# EAGLE board Gen7Extention (EAGLE 6.5.0)
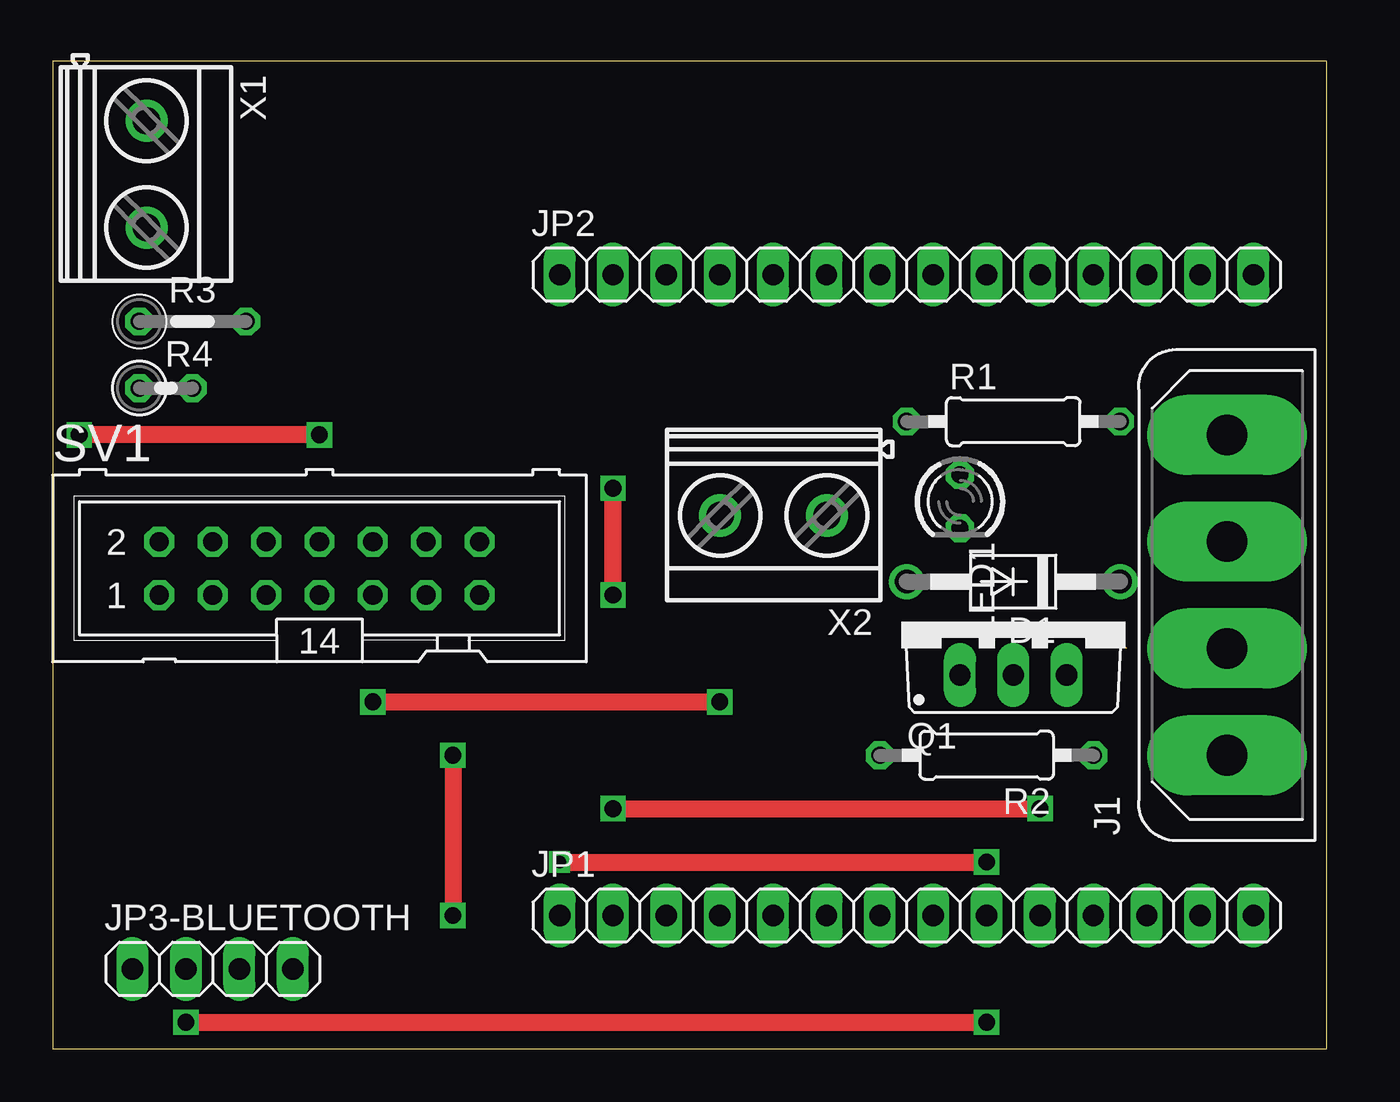
[diagram p0: board, top side]
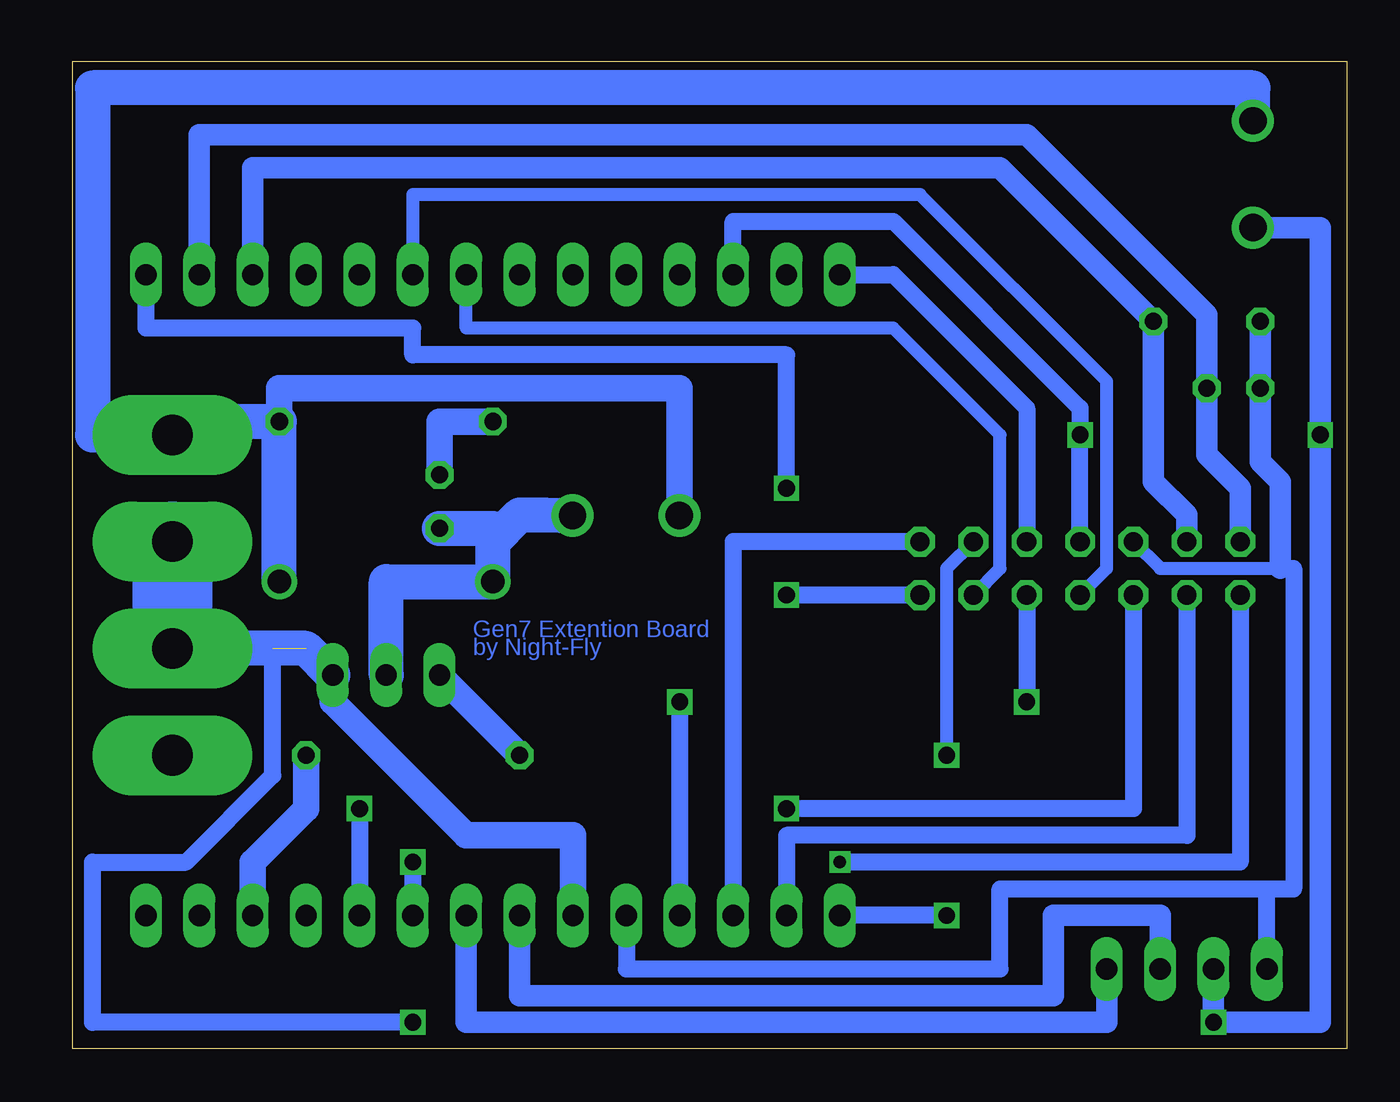
[diagram p1: board, bottom side, seen from below]

Size 60.63 x 46.98 mm. Coordinates in mm from the lower left corner, seen from the top.
Outline: 0,0 60.63,0 60.63,46.98 0,46.98 0,0
Copper layers (1*16): Top 0.035mm / dielectric 1.5mm / Bottom 0.035mm
Design rules "default": minimum track width 10mil, minimum drill 24mil, track to track 8mil, track to pad 8mil, pad to pad 8mil, via to via 8mil, smd to smd 8mil, copper to edge 40mil, drill to drill 8mil, minimum pad ring 10mil, minimum via ring 8mil, stop-mask expansion 4mil, vias tented up to drill 0mil, thermal gap 10mil
Net classes: 0 default: clearance 0.205 mm

## Footprints (pad centres in the part's own frame; a part is rotated, then mirrored left to right if it is on the bottom)
DO41-10 = drill 1.118: A 5.08,0; C -5.08,0
FLOPPY-4 = drill 1.93 pad 3.81 long: 1 7.62,0; 2 2.54,0; 3 -2.54,0; 4 -7.62,0
1X14 = drill 1.016 long: 1 -16.51,0; 2 -13.97,0; 3 -11.43,0; 4 -8.89,0; 5 -6.35,0; 6 -3.81,0; 7 -1.27,0; 8 1.27,0; 9 3.81,0; 10 6.35,0; 11 8.89,0; 12 11.43,0; 13 13.97,0; 14 16.51,0
1X04 = drill 1.016 long: 1 -3.81,0; 2 -1.27,0; 3 1.27,0; 4 3.81,0
LED3MM = drill 0.813 octagon: A -1.27,0; K 1.27,0
TO220BV = drill 1.016 long: D 0,-2.54; G -2.54,-2.54; S 2.54,-2.54
0207/10 = drill 0.813 octagon: 1 -5.08,0; 2 5.08,0
0207/5V = drill 0.813 octagon: 1 -2.54,0; 2 2.54,0
0207/2V = drill 0.813 octagon: 1 -1.27,0; 2 1.27,0
ML14 = drill 0.914 octagon: 1 -7.62,-1.27; 2 -7.62,1.27; 3 -5.08,-1.27; 4 -5.08,1.27; 5 -2.54,-1.27; 6 -2.54,1.27; 7 0,-1.27; 8 0,1.27; 9 2.54,-1.27; 10 2.54,1.27; 11 5.08,-1.27; 12 5.08,1.27; 13 7.62,-1.27; 14 7.62,1.27
MKDSN1,5/2-5,08 = drill 1.3 pad 2: 1 -2.561,0.025; 2 2.519,0.025

## Placement (x,y rotation side)
D1  1N4004  [DO41-10]  45.72,22.22 180 top
J1  [FLOPPY-4]  55.88,21.59 90 top
JP1  [1X14]  40.64,6.35 0 top
JP2  [1X14]  40.64,36.83 0 top
JP3-BLUETOOTH  [1X04]  7.62,3.81 0 top
LED1  [LED3MM]  43.18,26.04 270 top
Q1  IRLB 8743  [TO220BV]  45.72,20.32 0 top
R1  560  [0207/10]  45.72,29.84 0 top
R2  10  [0207/10]  44.45,13.97 180 top
R3  [0207/5V]  6.67,34.61 0 top
R4  [0207/2V]  5.4,31.43 0 top
SV1  [ML14]  12.7,22.86 0 top
X1  MKDSN1,5/2-5,08  [MKDSN1,5/2-5,08]  4.45,41.59 270 top
X2  MKDSN1,5/2-5,08  [MKDSN1,5/2-5,08]  34.29,25.4 180 top

## Library data of the parts
D1 = diode
J1 = con-amp
JP1 JP2 JP3-BLUETOOTH = pinhead
LED1 = led
Q1 = transistor-power
R1-R4 = rcl
SV1 = con-harting-ml; OC_FARNELL: unknown; OC_NEWARK: unknown
X1 X2 = con-phoenix-508; MPN: MKDSN 1,5/2-5.08; OC_FARNELL: 1792903; OC_NEWARK: 30M2397

## Nets
+12V: D1.C J1.1 R1.2 X1.1 X2.2
GND: J1.2 J1.3 JP1.6 JP2.3 JP3-BLUETOOTH.2 Q1.S SV1.8 X1.2
N$1: JP1.1 SV1.12
N$2: JP1.2 SV1.3
N$3: JP1.3 SV1.14
N$4: JP1.4 SV1.9
N$5: JP1.5 JP3-BLUETOOTH.1 R3.1 R4.1 SV1.6
N$6: JP1.7 JP3-BLUETOOTH.3
N$7: JP1.8 JP3-BLUETOOTH.4
N$8: D1.A LED1.K Q1.D X2.1
N$9: LED1.A R1.1
N$10: JP1.12 R2.1
N$11: Q1.G R2.2
N$12: JP2.13 R4.2 SV1.2
N$13: JP2.12 R3.2 SV1.4
N$14: JP2.14 SV1.13
N$15: JP2.1 SV1.10
N$16: JP2.8 SV1.11
N$17: JP2.9 SV1.7
N$18: JP1.9 SV1.1
N$19: JP1.10 SV1.5

## Tracks (layer width: path | path; a pad name or v marks a point on that pad's centre or on a via)
+12V
  Bottom 1.27: X2.2 31.77,31.41 31.75,31.43 50.8,31.43 R1.2
  Bottom 1.676: D1.C R1.2 55.24,29.84 J1.1 59.69,29.21 59.69,45.72 4.47,45.72 X1.1
GND  (via drill 0.6, 0.8)  (1 unrouted)
  Top 0.813: v12.7,29.21 v1.27,29.21 | v6.35,1.27 v44.45,1.27
  Bottom 0.813: SV1.8 v12.7,29.21 12.7,30.48 21.59,39.37 29.21,39.37 JP2.3 | v44.45,1.27 59.69,1.27 59.69,8.89 55.24,8.89 51.12,13.02 51.12,19.05
  Bottom 1.016: JP3-BLUETOOTH.2 v6.35,1.27 1.27,1.27 v1.27,29.21 1.27,39.07 X1.2
  Bottom 1.27: JP1.6 36.83,10.16 41.91,10.16 48.26,16.51 Q1.S
  Bottom 1.676: Q1.S 49.53,19.05 J1.3
  Bottom 3.81: J1.3 J1.2
N$1  (via drill 0.6, 0.8)
  Top 0.813: v19.05,13.97 v19.05,6.35
  Bottom 0.61: SV1.12 19.05,22.86 v19.05,13.97
  Bottom 0.813: v19.05,6.35 JP1.1
N$2
  Bottom 0.813: SV1.3 7.62,10.16 26.67,10.16 JP1.2
N$3
  Bottom 0.813: SV1.14 29.21,24.13 JP1.3
N$4  (via drill 0.6, 0.8)
  Top 0.813: v15.24,16.51 v31.75,16.51
  Bottom 0.813: SV1.9 v15.24,16.51 | v31.75,16.51 JP1.4
N$5
  Bottom 0.61: SV1.6 8.89,22.86 3.17,22.86
  Bottom 0.813: 3.17,22.86 2.54,22.86 2.54,7.62 3.81,7.62 | JP1.5 34.29,3.81 16.51,3.81 16.51,7.62 3.81,7.62 | JP3-BLUETOOTH.1 3.81,7.62
  Bottom 1.016: R4.1 R3.1 4.13,27.94 3.17,26.99 3.17,22.86
N$6
  Bottom 1.016: JP3-BLUETOOTH.3 8.89,6.35 13.97,6.35 13.97,2.54 39.37,2.54 JP1.7
N$7
  Bottom 1.016: JP3-BLUETOOTH.4 11.43,1.27 41.91,1.27 JP1.8
N$8
  Bottom 1.676: LED1.K 40.64,24.77 40.64,24.13 | Q1.D 45.72,22.22 D1.A 40.64,24.13 | 40.64,24.13 39.37,25.4 38.15,25.4 X2.1
N$9
  Bottom 1.27: LED1.A 43.18,29.84 R1.1
N$10
  Bottom 1.27: R2.1 49.53,11.43 52.07,8.89 JP1.12
N$11
  Bottom 1.27: R2.2 Q1.G
N$12
  Bottom 1.016: JP2.13 54.61,43.5 15.24,43.5 6.67,34.93 R4.2 6.67,28.26 5.08,26.67 SV1.2
N$13
  Bottom 1.016: JP2.12 52.07,41.91 16.51,41.91 R3.2 9.21,26.99 7.62,25.4 SV1.4
N$14  (via drill 0.6, 0.8)
  Top 0.813: v26.67,21.59 v26.67,26.67
  Bottom 0.813: SV1.13 v26.67,21.59 | v26.67,26.67 26.67,33.02 44.45,33.02 44.45,34.29 57.15,34.29 JP2.14
N$15
  Bottom 0.813: JP2.1 21.59,36.83 15.24,30.48 SV1.10
N$16
  Bottom 0.61: SV1.11 16.51,22.86 16.51,29.21 21.59,34.29 41.91,34.29 JP2.8
N$17
  Bottom 0.61: SV1.7 11.43,22.86 11.43,31.75 20.32,40.64 44.45,40.64 JP2.9
N$18  (via drill 0.6, 0.8)
  Top 0.813: v24.13,8.89 v44.45,8.89
  Bottom 0.813: SV1.1 5.08,8.89 v24.13,8.89 | v44.45,8.89 JP1.9
N$19  (via drill 0.6, 0.8)
  Top 0.813: v26.67,11.43 v46.99,11.43
  Bottom 0.813: SV1.5 10.16,11.43 v26.67,11.43 | v46.99,11.43 JP1.10

## Text on the board
Bottom: Gen7 Extention Board / by Night-Fly